# Altium PCB ISL6236A_DEMO.PcbDoc
Units mm, origin at the board's own origin, x right, y up, seen from the top; angles counter-clockwise.
Board outline 50 x 50 mm, 2 copper layers (Top Layer, Bottom Layer); 41 components, 27 nets, 119 pads, 0 vias.
Unrouted connection lines stored in the file: 88.
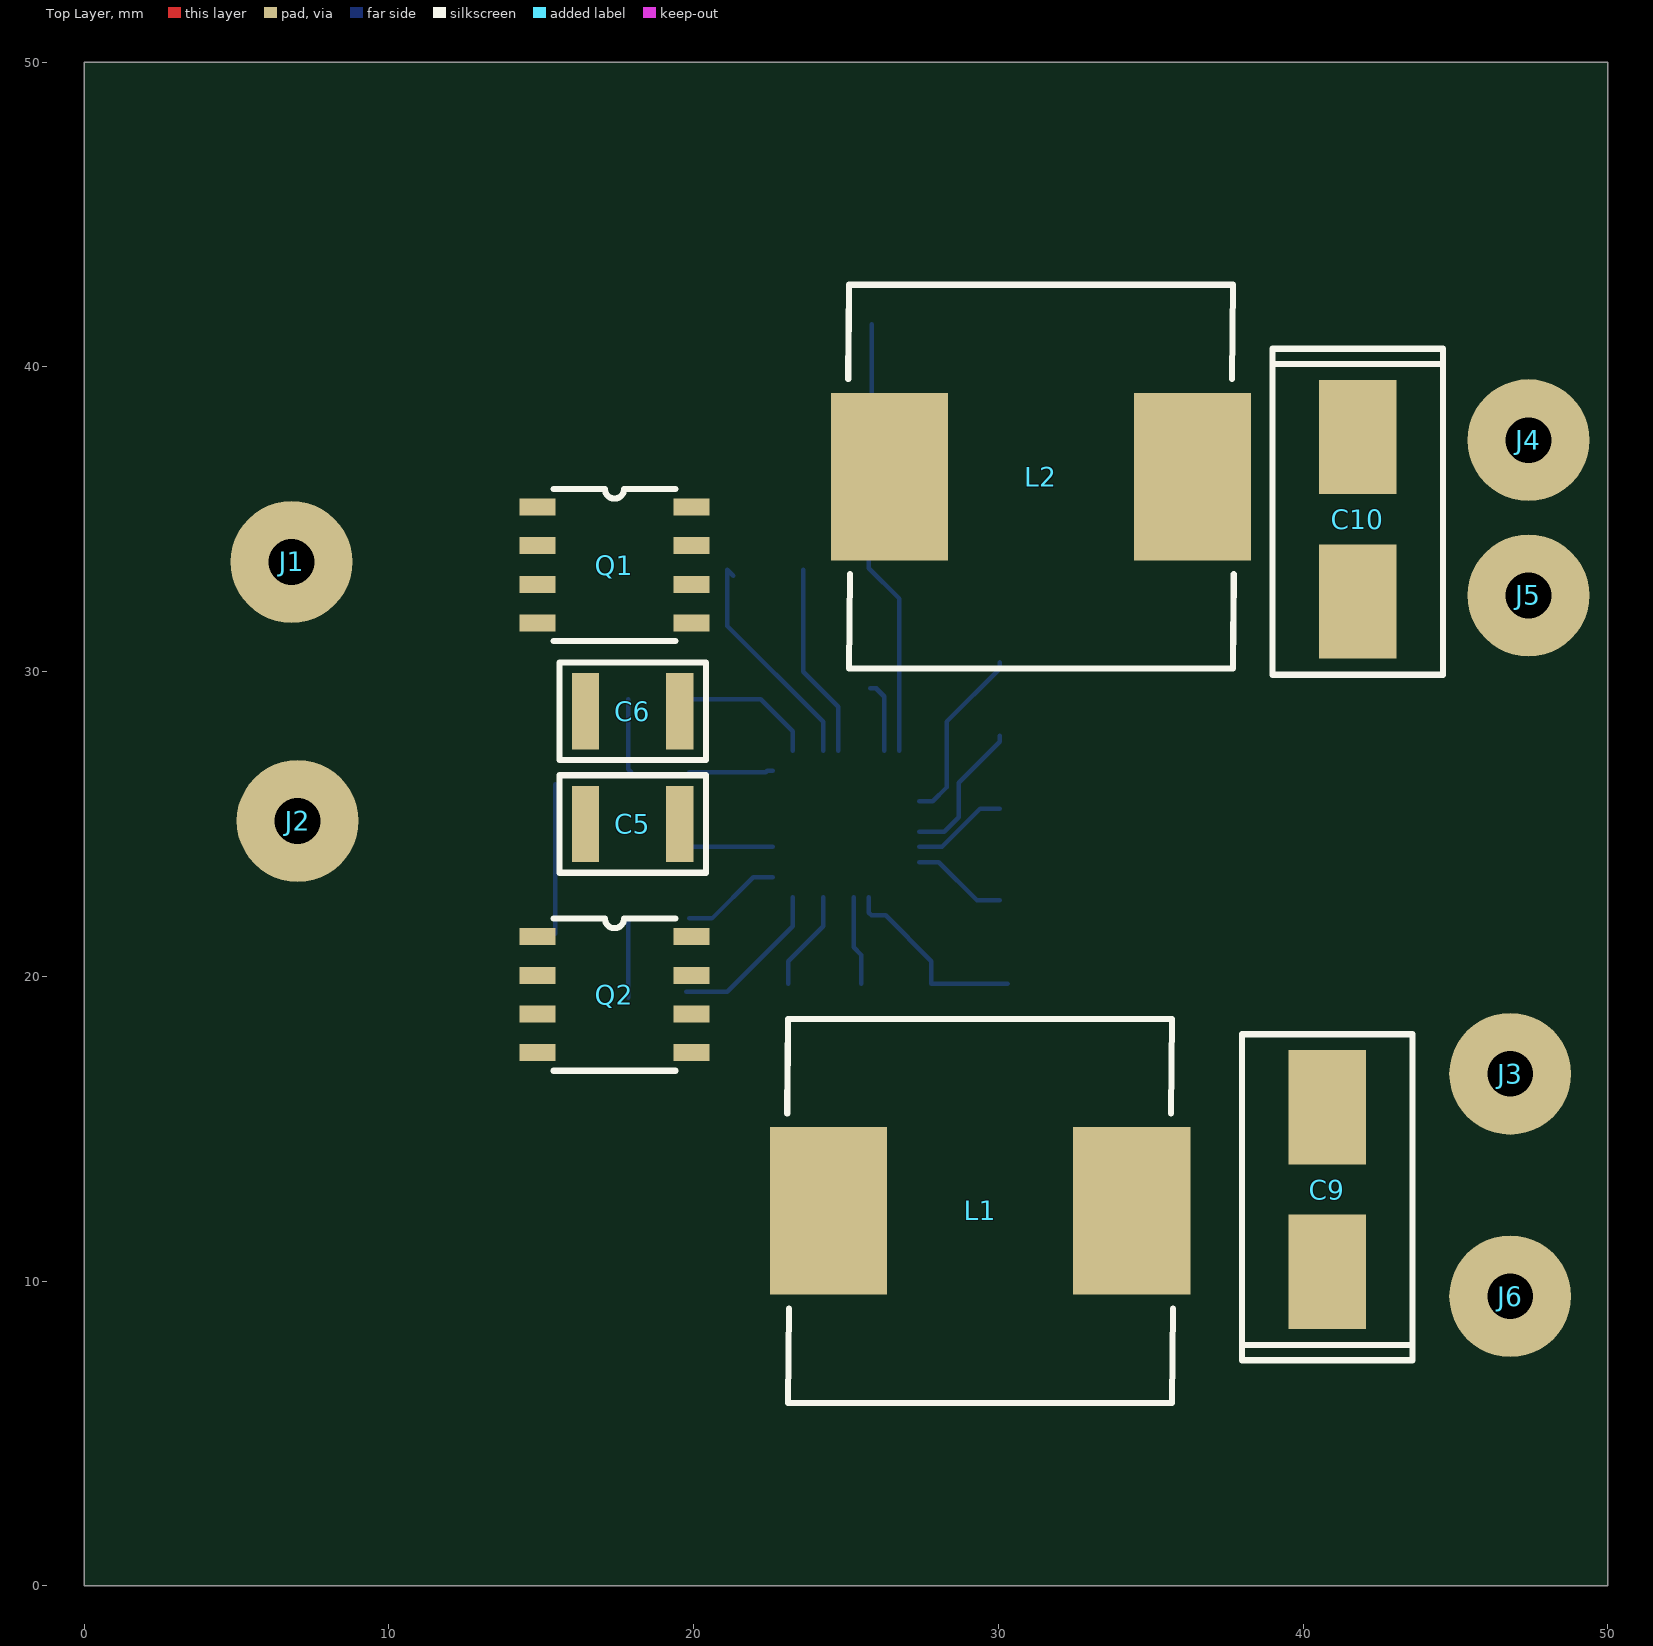
[diagram p0: Top Layer view]
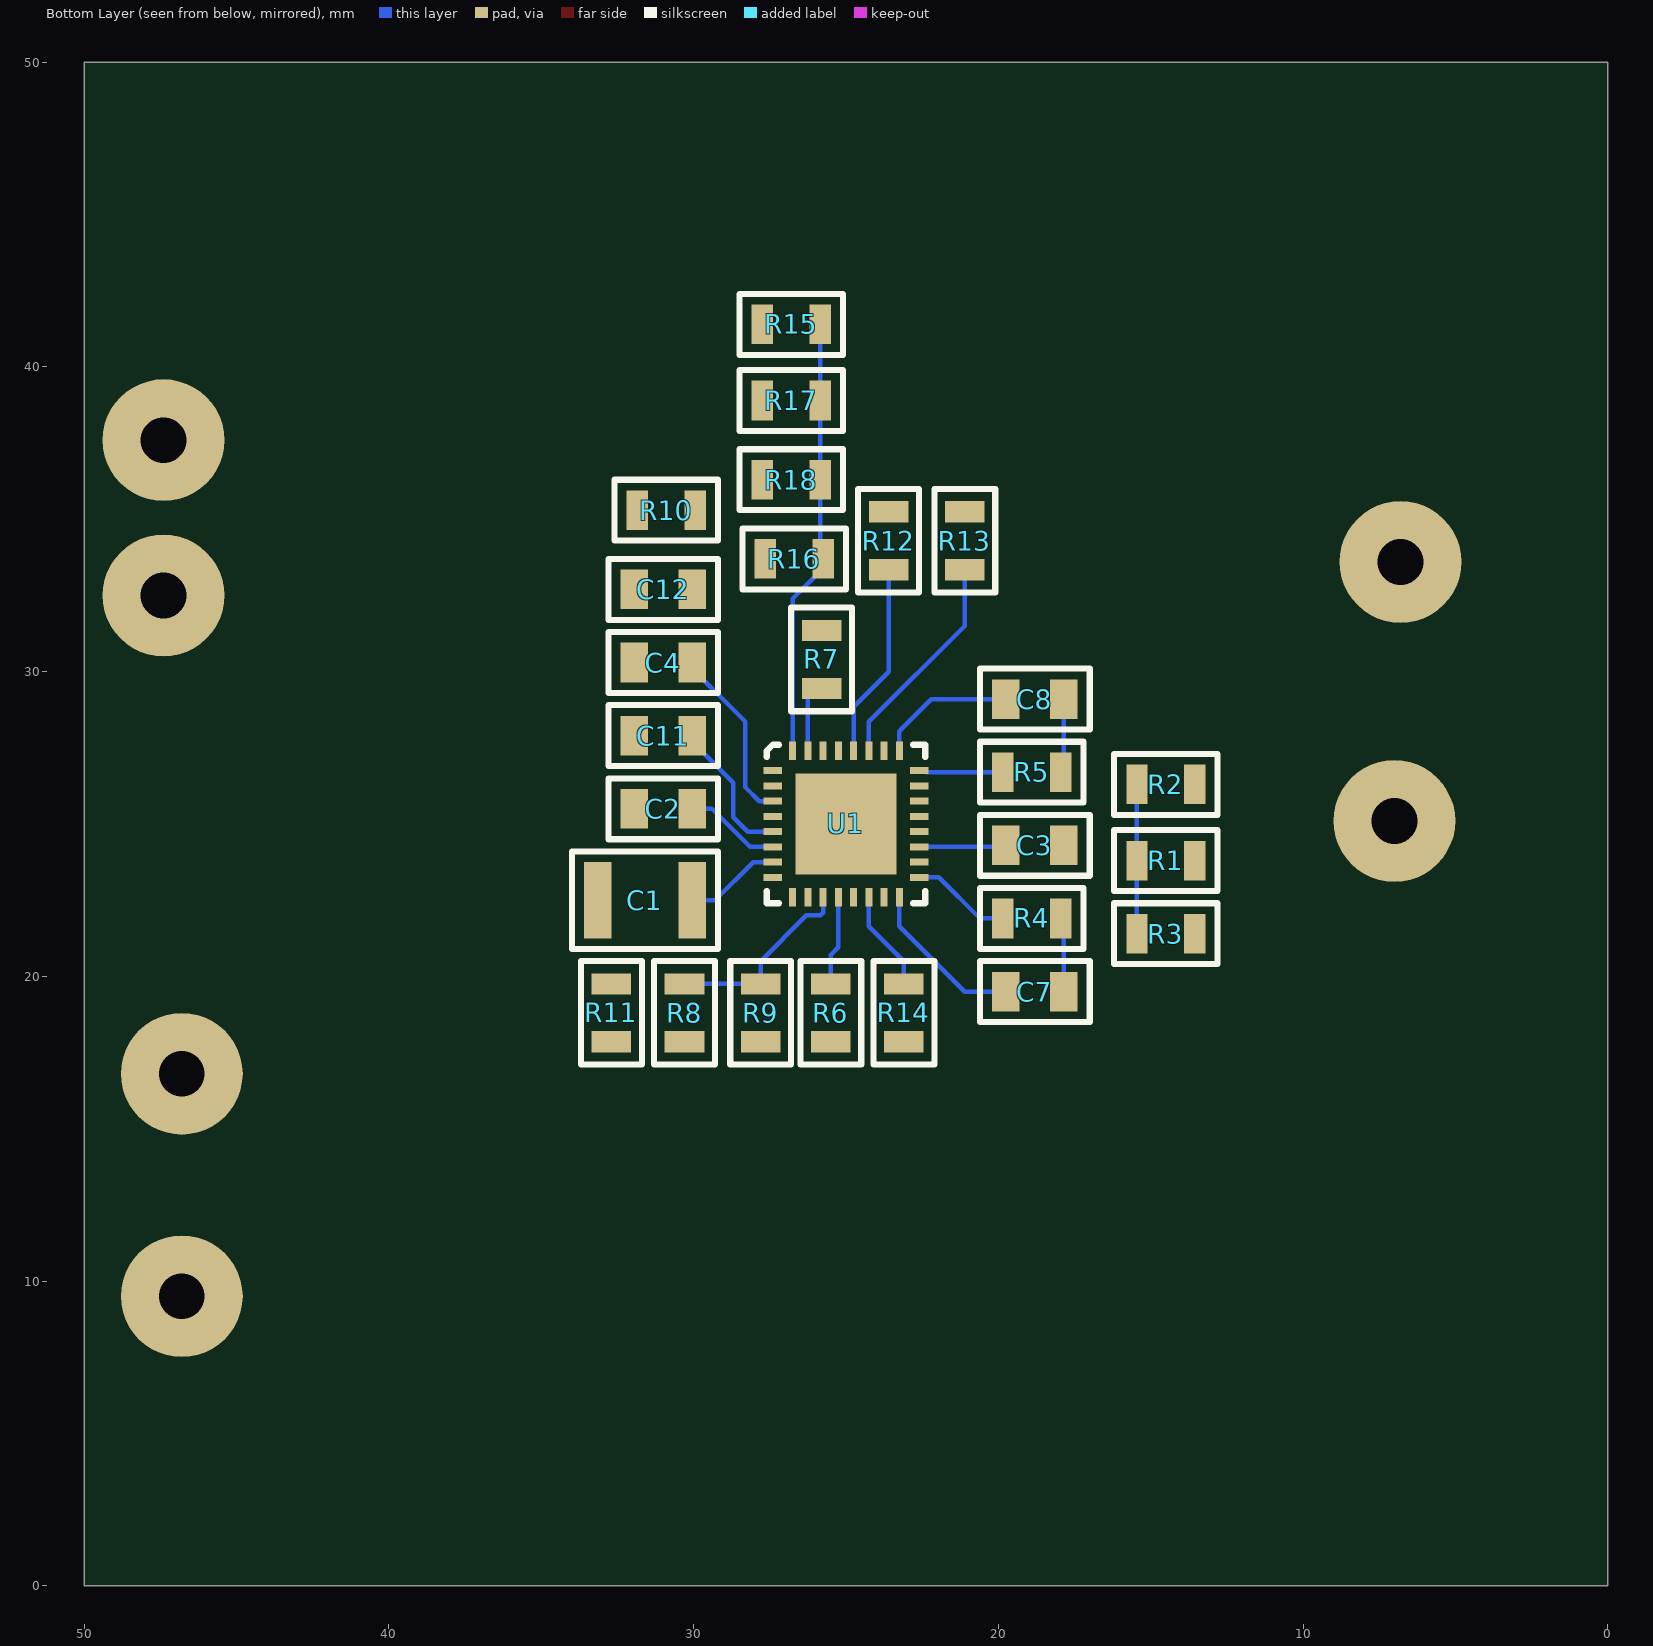
[diagram p1: Bottom Layer view, seen from below]

## Layer stack, top to bottom
Top Solder: solder mask 0.0102, Solder Resist, Dk 3.5
Top Layer: signal copper 0.0356
Dielectric 1: dielectric 0.32, FR-4, Dk 4.8
Bottom Layer: signal copper 0.0356
Bottom Solder: solder mask 0.0102, Solder Resist, Dk 3.5

## Board outline
0,50 50,50 50,0 0,0

## Design rules (kind name [scope] priority, off if disabled: settings)
Clearance [All] p1: gap=0.15 ignorepadtopadclearanceinfootprint=FALSE
ComponentClearance [All] p1: gap=0.1 collisioncheckmode=3 verticalgap=0.1 showdistances=FALSE
MinimumSolderMaskSliver [All] p1: minsoldermaskwidth=0.1
PolygonConnect [All] p1: connectstyle=Relief reliefconductorwidth=0.254 reliefentries=4 polygonreliefangle="90 Angle" airgapwidth=0.254
RoutingVias [All] p1: holewidth=0.711 width=1.27 viastyle="Through Hole" minholewidth=0.711 minwidth=1.27 maxholewidth=0.711 maxwidth=1.27
SilkToSolderMaskClearance [IsPad] p1: minsilkscreentomaskgap=0.1 clearancetoexposedcopper=TRUE
SolderMaskExpansion [All] p1: expansion=0.102 istentingtop=FALSE
Width [All] p1: maxlimit=10 minlimit=0.15 preferedwidth=0.15
27 further rules are at their usual default settings.

## Components (designator, comment, footprint, x,y, rotation, side; value= is the part's Value field where it differs from the comment)
C1 "4.7uF 10V" C1210 31.6,22.5 r180 bottom
C2 "1uF, 50V" C0805 31,25.5 r180 bottom
C3 "1uF, 50V" C0805 18.8,24.3 r0 bottom
C4 "1uF, 50V" C0805 31,30.3 r180 bottom
C5 "10uF 50V" C1210 18,25 r0 top
C6 "10uF 50V" C1210 18,28.7 r0 top
C7 "100nF" C0805 18.8,19.5 r180 bottom
C8 "220nF" C0805 18.8,29.1 r0 bottom
C9 "330uF 10V" 7343-43 40.8,13 r90 top
C10 "330uF 10V" 7343-43 41.8,35 r270 top
C11 "10nF" C0805 31,27.9 r0 bottom
C12 "100nF" C0805 31,32.7 r0 bottom
J1 "4MMx1.5MM" PAD_WITH_HOLE_4MMx1.5MM 6.8,33.6 r0 top
J2 "4MMx1.5MM" PAD_WITH_HOLE_4MMx1.5MM 7,25.1 r0 top
J3 "4MMx1.5MM" PAD_WITH_HOLE_4MMx1.5MM 46.8,16.8 r0 top
J4 "4MMx1.5MM" PAD_WITH_HOLE_4MMx1.5MM 47.4,37.6 r0 top
J5 "4MMx1.5MM" PAD_WITH_HOLE_4MMx1.5MM 47.4,32.5 r0 top
J6 "4MMx1.5MM" PAD_WITH_HOLE_4MMx1.5MM 46.8,9.5 r0 top
L1 "2u2, DR125-2R2-R" DR125 29.4,12.3 r180 top
L2 "2u2, DR125-2R2-R" DR125 31.4,36.4 r0 top
Q1 "SI4816BDY-T1-GE3" SO-8 17.4,33.5 r0 top
Q2 "SI4816BDY-T1-GE3" SO-8 17.4,19.4 r0 top
R1 "0R" R0805 14.5,23.8 r180 bottom
R2 "0R" R0805 14.5,26.3 r0 bottom
R3 "10R" R0805 14.5,21.4 r180 bottom
R4 "10R" R0805 18.9,21.9 r0 bottom
R5 "10R" R0805 18.9,26.7 r180 bottom
R6 "200K" R0805 25.5,18.8 r270 bottom
R7 "200K" R0805 25.8,30.4 r270 bottom
R8 "DNF" R0805 30.3,18.8 r90 bottom
R9 "0R" R0805 27.8,18.8 r270 bottom
R10 "10K" R0805 30.9,35.3 r180 bottom
R11 "DNF" R0805 32.7,18.8 r90 bottom
R12 "200K" R0805 23.6,34.3 r90 bottom
R13 "200K" R0805 21.1,34.3 r90 bottom
R14 "10K" R0805 23.1,18.8 r270 bottom
R15 "DNF" R0805 26.8,41.4 r180 bottom
R16 "0R" R0805 26.7,33.7 r0 bottom
R17 "DNF" R0805 26.8,38.9 r180 bottom
R18 "DNF" R0805 26.8,36.3 r0 bottom
U1 "ISL6236AIRZ" LL32.5x5B 25,25 r180 bottom

## Footprints (in the part's own frame and the unit in brackets; to place one, negate y for a bottom-side part, rotate by r counter-clockwise, add the part's x,y. Pads: shape width x height; smd on the part's side, far side on the other; paste and mask are expansions set on the pad)
7343-43 [mm]
  rect 3.75x2.55 smd: 1(-2.7,0) 2(2.7,0)
  silkscreen extent -5.6,-2.8 5.1,2.8
C0805 [mm]
  rect 0.9x1.3 smd: 1(-0.95,0) 2(0.95,0)
  silkscreen extent -1.8,-1 1.8,1
C1210 [mm]
  rect 0.9x2.5 smd: 1(-1.55,0) 2(1.55,0)
  silkscreen extent -2.4,-1.6 2.4,1.6
DR125 [mm]
  rect 3.85x5.5 smd: 1(-4.975,0) 2(4.975,0)
  silkscreen extent -6.33,-6.3 6.33,6.3
LL32.5x5B [mm]
  rect 0.6x0.23 smd mask+0.051: 1(-2.4,1.75) 2(-2.4,1.25) 3(-2.4,0.75) 4(-2.4,0.25) 5(-2.4,-0.25) 6(-2.4,-0.75) 7(-2.4,-1.25) 8(-2.4,-1.75) 17(2.4,-1.75) 18(2.4,-1.25) 19(2.4,-0.75) 20(2.4,-0.25) 21(2.4,0.25) 22(2.4,0.75) 23(2.4,1.25) 24(2.4,1.75)
  rect 0.23x0.6 smd mask+0.051: 9(-1.75,-2.4) 10(-1.25,-2.4) 11(-0.75,-2.4) 12(-0.25,-2.4) 13(0.25,-2.4) 14(0.75,-2.4) 15(1.25,-2.4) 16(1.75,-2.4) 25(1.75,2.4) 26(1.25,2.4) 27(0.75,2.4) 28(0.25,2.4) 29(-0.25,2.4) 30(-0.75,2.4) 31(-1.25,2.4) 32(-1.75,2.4)
  rect 3.3x3.3 smd mask+0.051: 33(0,0)
  silkscreen extent -2.6,-2.6 2.6,2.6
PAD_WITH_HOLE_4MMx1.5MM [mm]
  round 4 hole 1.5: 1(0,0)
R0805 [mm]
  rect 0.7x1.3 smd: 1(-0.95,0) 2(0.95,0)
  silkscreen extent -1.7,-1 1.7,1
SO-8 [mm]
  rect 1.194x0.559 smd: 1(-2.527,1.905) 2(-2.527,0.635) 3(-2.527,-0.635) 4(-2.527,-1.905) 5(2.527,-1.905) 6(2.527,-0.635) 7(2.527,0.635) 8(2.527,1.905)
  silkscreen extent -2,-2.5 2,2.5

## Part data
C1: library part C3225X7R1H105M/2.00, "Cap Ceramic 1uF 50V X7R 20% SMD 1210 125°C Blister T/R", Capacitance=1uF, Case Code (Imperial)=1210, Case Code (Metric)=3225, Dielectric=X7R, Manufacturer=TDK, Max Operating Temperature=125°C, Min Operating Temperature=-55°C, Package Quantity=1, Supplier Part Number 1=48T2930, Tolerance=20%, Voltage Rating=50V, Case/Package=1210, Category="Ceramic Capacitors", ComponentLink1Description=https://datasheet.ciiva.com/162/c-series-generalappl-b11-162224.pdf?src-supplier=Digi-Key, ComponentLink1URL=https://datasheet.ciiva.com/162/c-series-generalappl-b11-162224.pdf?src-supplier=Digi-Key, ComponentLink2Description=https://datasheet.ciiva.com/162/c-series-generalappl-b11-162225.pdf?src-supplier=Digi-Key, ComponentLink2URL=https://datasheet.ciiva.com/162/c-series-generalappl-b11-162225.pdf?src-supplier=Digi-Key, ComponentLink3Description=https://datasheet.ciiva.com/162/c-series-generalappl-b11-162223.pdf?src-supplier=Digi-Key, ComponentLink3URL=https://datasheet.ciiva.com/162/c-series-generalappl-b11-162223.pdf?src-supplier=Digi-Key, Construction=Flat, Length=0.126inch, Manufacturer Part Number=C3225X7R1H105M/2.00, Mount="Surface Mount", Number of Pins=2, Packaging="Tape and Reel", RoHS=Yes, RoHS Compliant=Yes, Series=C, Supplier 1=Newark, Thickness=0.087inch, Voltage Rating (DC)=50V, Width=0.098inch
C2 C3 C4: library part C2012X7R1H105K125AB, "C Series 0805 1 uF 50 V ±10% Tolerance X7R SMT Multilayer Ceramic Capacitor", Capacitance=1uF, Case Code (Imperial)=0805, Case Code (Metric)=2012, Dielectric=X7R, Dielectric Material=Ceramic, Manufacturer=TDK, Max Operating Temperature=125°C, Min Operating Temperature=-55°C, Package Quantity=1, Supplier Part Number 1=79Y4372, Tolerance=10%, Voltage Rating=50V, Case/Package=0805, Category="Ceramic Capacitors", ComponentLink1Description=https://datasheet.ciiva.com/22718/1796654-22718037.pdf?src-supplier=Element14, ComponentLink1URL=https://datasheet.ciiva.com/22718/1796654-22718037.pdf?src-supplier=Element14, ComponentLink2Description=https://datasheet.ciiva.com/6274/tdkmlcccaprange-6274890.pdf?src-supplier=Digi-Key, ComponentLink2URL=https://datasheet.ciiva.com/6274/tdkmlcccaprange-6274890.pdf?src-supplier=Digi-Key, ComponentLink3Description=https://datasheet.ciiva.com/23803/1796654-23803036.pdf?src-supplier=Newark, ComponentLink3URL=https://datasheet.ciiva.com/23803/1796654-23803036.pdf?src-supplier=Newark, ComponentLink4Description=https://datasheet.ciiva.com/28673/mlcc-commercial-general-en-28673565.pdf?src-supplier=Element14, ComponentLink4URL=https://datasheet.ciiva.com/28673/mlcc-commercial-general-en-28673565.pdf?src-supplier=Element14, ComponentLink5Description=https://datasheet.ciiva.com/6274/tdkmlcccaprange-6274886.pdf?src-supplier=Digi-Key, ComponentLink5URL=https://datasheet.ciiva.com/6274/tdkmlcccaprange-6274886.pdf?src-supplier=Digi-Key, ComponentLink6Description=https://datasheet.ciiva.com/6274/tdkmlcccaprange-6274888.pdf?src-supplier=Digi-Key, ComponentLink6URL=https://datasheet.ciiva.com/6274/tdkmlcccaprange-6274888.pdf?src-supplier=Digi-Key, ComponentLink7Description=https://datasheet.ciiva.com/24191/general-b11-24191449.pdf?src-supplier=Future+Electronics, ComponentLink7URL=https://datasheet.ciiva.com/24191/general-b11-24191449.pdf?src-supplier=Future+Electronics, Construction=Flat, Depth=1.25mm, Height=1.25mm, Lead Free="Lead Free", Length=2mm, Manufacturer Part Number=C2012X7R1H105K125AB, Mount="Surface Mount", Number of Pins=2, Packaging="Tape and Reel", Pricing 1="1=0.07800, 2000=0.07500, 4000=0.07300 (USD)", Radiation Hardening=No, REACH SVHC="No SVHC", Resistor Type=Ceramic, RoHS=Yes, RoHS Compliant=Yes, Series=C, Stock 1=428000, Supplier 1=Newark, Termination=SMD/SMT, Thickness=0.057inch, Voltage Rating (DC)=50V, Weight=0.000194oz, Width=0.049inch
C5 C6: library part UMK325BJ106MM-T, "Multilayer Ceramic Capacitors (High dielectric type), 50V, 10 uF, ± 20 %, 1210, X5R, RoHS", Capacitance=10uF, Case Code (Imperial)=1210, Case Code (Metric)=3225, Dielectric=X5R, Manufacturer="Taiyo Yuden", Max Operating Temperature=85°C, Min Operating Temperature=-55°C, Package Quantity=500, Supplier Part Number 1=61M4721, Tolerance=20%, Voltage=50V, Case/Package=1210, Category="Ceramic Capacitors", ComponentLink1Description=https://datasheet.ciiva.com/141/umk325bj106mm-t-ss-141730.pdf?src-supplier=Digi-Key, ComponentLink1URL=https://datasheet.ciiva.com/141/umk325bj106mm-t-ss-141730.pdf?src-supplier=Digi-Key, ComponentLink2Description=https://datasheet.ciiva.com/15922/1153umk325bj106mm-t-15922661.pdf?src-supplier=Onlinecomponents.com, ComponentLink2URL=https://datasheet.ciiva.com/15922/1153umk325bj106mm-t-15922661.pdf?src-supplier=Onlinecomponents.com, ComponentLink3Description=https://datasheet.ciiva.com/11601/umk325bj106mm-t-ss-11601831.pdf?src-supplier=Avnet, ComponentLink3URL=https://datasheet.ciiva.com/11601/umk325bj106mm-t-ss-11601831.pdf?src-supplier=Avnet, ComponentLink4Description=https://datasheet.ciiva.com/30172/998umk325bj106mm-t-30172061.pdf?src-supplier=Onlinecomponents.com, ComponentLink4URL=https://datasheet.ciiva.com/30172/998umk325bj106mm-t-30172061.pdf?src-supplier=Onlinecomponents.com, ComponentLink5Description=https://datasheet.ciiva.com/7975/1497285-7975925.pdf?src-supplier=Element14, ComponentLink5URL=https://datasheet.ciiva.com/7975/1497285-7975925.pdf?src-supplier=Element14, ComponentLink6Description=https://datasheet.ciiva.com/7975/mlcc-all-e-7975926.pdf?src-supplier=Element14, ComponentLink6URL=https://datasheet.ciiva.com/7975/mlcc-all-e-7975926.pdf?src-supplier=Element14, ComponentLink7Description=https://datasheet.ciiva.com/5745/mlcc-all-e-5745129.pdf?src-supplier=Farnell, ComponentLink7URL=https://datasheet.ciiva.com/5745/mlcc-all-e-5745129.pdf?src-supplier=Farnell, ComponentLink8Description=https://datasheet.ciiva.com/5744/1497285-5744924.pdf?src-supplier=Farnell, ComponentLink8URL=https://datasheet.ciiva.com/5744/1497285-5744924.pdf?src-supplier=Farnell, Construction=Flat, Contact Plating=Nickel, Depth=2.5mm, Halogen Free="Halogen Free", Height=2.5mm, Lead Free="Lead Free", Length=3.2mm, Manufacturer Part Number=UMK325BJ106MM-T, Mount="Surface Mount", Number of Pins=2, Packaging="Tape and Reel", Pricing 1="500=0.25400, 1000=0.23400, 2000=0.22800, 3000=0.22100, 5000=0.21000 (USD)", Radiation Hardening=No, REACH SVHC="No SVHC", RoHS=Yes, RoHS Compliant=Yes, Series=M, Stock 1=1500, Supplier 1=Avnet, Termination=SMD/SMT, Thickness=0.106inch, Voltage Rating=50V, Voltage Rating (DC)=50V, Width=0.098inch
C7 C12: library part C2012X7R1H104K085AA, "C Series 0805 0.1 uF 50 V ±10 % Tolerance X7R SMT Multilayer Ceramic Capacitor", Case Code (Imperial)=0805, Case Code (Metric)=2012, Dielectric=X7R, Dielectric Material=Ceramic, Manufacturer=TDK, Max Operating Temperature=125°C, Min Operating Temperature=-55°C, Package Quantity=1, Supplier Part Number 1=445-7534-1-ND, Tolerance=10%, Voltage=50V, Capacitance=100nF, Case/Package=0805, Category="Ceramic Capacitors", ComponentLink1Description=https://datasheet.ciiva.com/11788/0900766b80c1bb00-11788128.pdf?src-supplier=RSComponents, ComponentLink1URL=https://datasheet.ciiva.com/11788/0900766b80c1bb00-11788128.pdf?src-supplier=RSComponents, ComponentLink2Description=https://datasheet.ciiva.com/6250/tdkmlcccaprange-6250821.pdf?src-supplier=Digi-Key, ComponentLink2URL=https://datasheet.ciiva.com/6250/tdkmlcccaprange-6250821.pdf?src-supplier=Digi-Key, ComponentLink3Description=https://datasheet.ciiva.com/24191/e412-c-24191447.pdf?src-supplier=Future+Electronics, ComponentLink3URL=https://datasheet.ciiva.com/24191/e412-c-24191447.pdf?src-supplier=Future+Electronics, ComponentLink4Description=https://datasheet.ciiva.com/6250/tdkmlcccaprange-6250824.pdf?src-supplier=Digi-Key, ComponentLink4URL=https://datasheet.ciiva.com/6250/tdkmlcccaprange-6250824.pdf?src-supplier=Digi-Key, ComponentLink5Description=https://datasheet.ciiva.com/23803/1796654-23803035.pdf?src-supplier=Newark, ComponentLink5URL=https://datasheet.ciiva.com/23803/1796654-23803035.pdf?src-supplier=Newark, ComponentLink6Description=https://datasheet.ciiva.com/28602/1571323-28602204.pdf?src-supplier=Element14, ComponentLink6URL=https://datasheet.ciiva.com/28602/1571323-28602204.pdf?src-supplier=Element14, Construction=Flat, Depth=1.25mm, Height=0.85mm, Lead Free="Lead Free", Length=2mm, Manufacturer Part Number=C2012X7R1H104K085AA, Mount="Surface Mount", Number of Pins=2, Packaging="Tape and Reel", Pricing 1="1=0.15000, 10=0.10400, 50=0.05900, 100=0.04880, 500=0.03422, 1000=0.02833 (USD)", Radiation Hardening=No, REACH SVHC="No SVHC", Resistor Type=Ceramic, RoHS=Yes, RoHS Compliant=Yes, Series=C, Stock 1=4695, Supplier 1=Digi-Key, Termination=SMD/SMT, Thickness=0.037inch, Voltage Rating=50V, Voltage Rating (DC)=50V, Weight=0.000194oz, Width=0.049inch
C8: library part C2012X7R1H224K125AA, "CERAMIC CAPACITOR 0.22UF, 50V, X7R, 10%, 0805, FULL REEL; Product Range:C Series; Capacitance:0.22 F; Capacitance Tolerance:  10%; Dielectric Characteristic:X7R; Voltage Rating:50V; Ceramic Capacitor Case:0805 ^2012 Metric]; MSL:-", Case Code (Imperial)=0805, Case Code (Metric)=2012, Dielectric=X7R, Dielectric Material=Ceramic, Manufacturer=TDK, Max Operating Temperature=125°C, Min Operating Temperature=-55°C, Package Quantity=1, Supplier Part Number 1=445-1350-1-ND, Tolerance=10%, Voltage=50V, Capacitance=220nF, Case/Package=0805, Category="Ceramic Capacitors", ComponentLink1Description=https://datasheet.ciiva.com/11788/0900766b80c1bb00-11788127.pdf?src-supplier=RSComponents, ComponentLink1URL=https://datasheet.ciiva.com/11788/0900766b80c1bb00-11788127.pdf?src-supplier=RSComponents, ComponentLink2Description=https://datasheet.ciiva.com/17487/e412-c-17487255.pdf?src-supplier=Avnet+Europe, ComponentLink2URL=https://datasheet.ciiva.com/17487/e412-c-17487255.pdf?src-supplier=Avnet+Europe, ComponentLink3Description=https://datasheet.ciiva.com/6292/tdkmlcccaprange-6292269.pdf?src-supplier=Digi-Key, ComponentLink3URL=https://datasheet.ciiva.com/6292/tdkmlcccaprange-6292269.pdf?src-supplier=Digi-Key, ComponentLink4Description=https://datasheet.ciiva.com/16427/e412-c-16427832.pdf?src-supplier=Future+Electronics, ComponentLink4URL=https://datasheet.ciiva.com/16427/e412-c-16427832.pdf?src-supplier=Future+Electronics, ComponentLink5Description=https://datasheet.ciiva.com/28602/1571323-28602205.pdf?src-supplier=Element14, ComponentLink5URL=https://datasheet.ciiva.com/28602/1571323-28602205.pdf?src-supplier=Element14, Construction=Flat, Depth=1.25mm, Height=1.25mm, Lead Free="Lead Free", Length=2mm, Manufacturer Part Number=C2012X7R1H224K125AA, Mount="Surface Mount", Number of Pins=2, Packaging="Tape and Reel", Pricing 1="1=0.16000, 10=0.11600, 50=0.06580, 100=0.05450, 500=0.03824, 1000=0.03166 (USD)", Radiation Hardening=No, REACH SVHC="No SVHC", Resistor Type=Ceramic, RoHS=Yes, RoHS Compliant=Yes, Series=C, Stock 1=191329, Supplier 1=Digi-Key, Termination=SMD/SMT, Thickness=0.057inch, Voltage Rating=50V, Voltage Rating (DC)=50V, Weight=0.000194oz, Width=0.049inch
C9 C10: library part T530X337M010ATE004, "Cap Tant Solid 330uF 10V X CASE 20% (7.3 X 4.3 X 4mm) SMD 7343-43 0.004 Ohm 125 C T/R", Capacitance=330uF, Case Code (Imperial)=2917, Case Code (Metric)=7343, ESR (Equivalent Series Resistance)=4mR, Leakage Current=330uA, Manufacturer=KEMET, Max Operating Temperature=125°C, Min Operating Temperature=-55°C, Package Quantity=500, Ripple Current=8.2A, Supplier Part Number 1=399-10378-1-ND, Tolerance=20%, Voltage=10V, Case/Package=2917, Category="Polymer Capacitors", ComponentLink1Description=https://datasheet.ciiva.com/11794/0900766b80deaa91-11794477.pdf?src-supplier=RSComponents, ComponentLink1URL=https://datasheet.ciiva.com/11794/0900766b80deaa91-11794477.pdf?src-supplier=RSComponents, ComponentLink2Description=https://datasheet.ciiva.com/14593/70096008-14593753.pdf?src-supplier=Allied+Electronics, ComponentLink2URL=https://datasheet.ciiva.com/14593/70096008-14593753.pdf?src-supplier=Allied+Electronics, Construction=Flat, Depth=4.3mm, Dissipation Factor=8%, Features="General Purpose", Height=4mm, Height - Seated (Max)=0.169inch, Length=7.3mm, Life (Hours)=2000Hour, Manufacturer Part Number=T530X337M010ATE004, Mount="Surface Mount,PCB", Packaging="Tape and Reel", Polarity=Polar, Pricing 1="1=8.13000, 10=7.23000, 50=6.32620, 100=5.78400 (USD)", REACH SVHC="No SVHC", RoHS=Yes, RoHS Compliant=Yes, Series=T530, Stock 1=41, Supplier 1=Digi-Key, Termination=SMD/SMT, Voltage Rating=10V, Voltage Rating (DC)=10V, Width=4.3mm
C11: library part VJ0805Y103KNAAO, "0805 VJ 10nF Ceramic Multilayer Capacitor; 50V; +105C; X7R Dielectric; +/-10% SMD", Case Code (Imperial)=0805, Case Code (Metric)=2012, Dielectric=X7R, Manufacturer="Vishay Vitramon", Max Operating Temperature=125°C, Min Operating Temperature=-55°C, Package Quantity=1, Supplier Part Number 1=720-1244-1-ND, Tolerance=10%, Voltage=50V, Capacitance=10nF, Case/Package=0805, Category="Ceramic Capacitors", ComponentLink1Description=https://datasheet.ciiva.com/25613/0900766b8104796c-25613141.pdf?src-supplier=RSComponents, ComponentLink1URL=https://datasheet.ciiva.com/25613/0900766b8104796c-25613141.pdf?src-supplier=RSComponents, ComponentLink2Description=https://datasheet.ciiva.com/148/nonmagneticepoxybond-148342.pdf?src-supplier=Digi-Key, ComponentLink2URL=https://datasheet.ciiva.com/148/nonmagneticepoxybond-148342.pdf?src-supplier=Digi-Key, ComponentLink3Description=https://datasheet.ciiva.com/148/nonmagneticepoxybond-148343.pdf?src-supplier=Digi-Key, ComponentLink3URL=https://datasheet.ciiva.com/148/nonmagneticepoxybond-148343.pdf?src-supplier=Digi-Key, ComponentLink4Description=https://datasheet.ciiva.com/148/nonmagneticepoxybond-148344.pdf?src-supplier=Digi-Key, ComponentLink4URL=https://datasheet.ciiva.com/148/nonmagneticepoxybond-148344.pdf?src-supplier=Digi-Key, ComponentLink5Description=https://datasheet.ciiva.com/46417/1805046-46417853.pdf?src-supplier=Element14, ComponentLink5URL=https://datasheet.ciiva.com/46417/1805046-46417853.pdf?src-supplier=Element14, ComponentLink6Description=https://datasheet.ciiva.com/46417/1805046-46417854.pdf?src-supplier=Element14, ComponentLink6URL=https://datasheet.ciiva.com/46417/1805046-46417854.pdf?src-supplier=Element14, Construction=Flat, Depth=1.25mm, Height=1.45mm, Length=2mm, Manufacturer Part Number=VJ0805Y103KNAAO, Mount="Surface Mount", Packaging="Tape and Reel", Pricing 1="1=0.67000, 10=0.41200, 50=0.29580, 100=0.25580, 500=0.18218, 1000=0.15504 (USD)", Radiation Hardening=No, REACH SVHC=Unknown, RoHS=Yes, RoHS Compliant=Yes, Series=VJ, Stock 1=1009, Supplier 1=Digi-Key, Termination=SMD/SMT, Thickness=0.057inch, Voltage Rating=50V, Voltage Rating (DC)=50V, Width=0.049inch
J1 J2 J3 J4 J5 J6: library part PAD_WITH_HOLE_4MMx1.5MM, "Pad with a hole 4mm x 1.5mm"
L1 L2: library part DR125-2R2-R, "FIXED IND 2.2UH 10.9A 4.5 MOHM", Case/Package=Nonstandard, Current Rating=10.9A, DC Resistance (DCR)=4.5mR, Inductance=2.2uH, Inductance Tolerance=20%, Manufacturer="Eaton Cooper", Max Operating Temperature=125°C, Min Operating Temperature=-40°C, Package Quantity=600, Resistor Type=Wirewound, Saturation Current=15A, Self Resonant Frequency=100kHz, Supplier Part Number 1=513-1662-1-ND, Category="Fixed Inductors", ComponentLink1Description=https://datasheet.ciiva.com/14667/0900766b8116a153-14667792.pdf?src-supplier=RSComponents, ComponentLink1URL=https://datasheet.ciiva.com/14667/0900766b8116a153-14667792.pdf?src-supplier=RSComponents, ComponentLink2Description=https://datasheet.ciiva.com/26926/getdatasheetpartid-571249-26926912.pdf?src-supplier=Verical, ComponentLink2URL=https://datasheet.ciiva.com/26926/getdatasheetpartid-571249-26926912.pdf?src-supplier=Verical, ComponentLink3Description=https://datasheet.ciiva.com/8004/87246-8004874.pdf?src-supplier=Element14, ComponentLink3URL=https://datasheet.ciiva.com/8004/87246-8004874.pdf?src-supplier=Element14, Core Material=Ferrite, DC Current=10.9A, Depth=12.5mm, Height=6mm, Height - Seated (Max)=0.236inch, Lead Free="Lead Free", Length=12.5mm, Manufacturer Part Number=DR125-2R2-R, Max DC Current=10.9A, Military Standard=Not, Mount="Surface Mount", Number of Pins=2, Packaging="Tape and Reel", Pricing 1="1=1.35000, 10=1.25100, 25=1.15520, 50=0.96240, 100=0.90480, 250=0.80848 (USD)", Radiation Hardening=No, Rated Current-Max=10.9A, REACH SVHC="No SVHC", RMS Current (Irms)=10.9A, RoHS=Yes, RoHS Compliant=Yes, Series=DR, Shielding=Shielded, Supplier 1=Digi-Key, Termination=SMD/SMT, Test Frequency=100kHz, Tolerance=20%, Weight=0.144oz, Width=0.492inch
Q1 Q2: "Transistor MOSFET Array Dual N-CH 30V 5.8A/8.2A 8-Pin SOIC T/R", Case/Package=SO, Continuous Drain Current (ID)=5.8A, Drain to Source Resistance=9.3mR, Drain to Source Voltage (Vdss)=30V, Drain-source On Resistance-Max=18.5mR, Gate to Source Voltage (Vgs)=20V, Manufacturer="Vishay Siliconix", Max Operating Temperature=150°C, Max Power Dissipation=1.25W, Min Operating Temperature=-55°C, Package Quantity=1, Supplier Part Number 1=SI4816BDY-T1-GE3CT-ND, Threshold Voltage=3V, Category=MOSFETs, ComponentLink1Description=https://datasheet.ciiva.com/26789/si4816bdy-t1-ge3-26789227.pdf?src-supplier=IIIC, ComponentLink1URL=https://datasheet.ciiva.com/26789/si4816bdy-t1-ge3-26789227.pdf?src-supplier=IIIC, ComponentLink2Description=https://datasheet.ciiva.com/7710/si4816bd-7710215.pdf?src-supplier=Element14, ComponentLink2URL=https://datasheet.ciiva.com/7710/si4816bd-7710215.pdf?src-supplier=Element14, ComponentLink3Description=https://datasheet.ciiva.com/24158/si4816bd-24158215.pdf?src-supplier=Future+Electronics, ComponentLink3URL=https://datasheet.ciiva.com/24158/si4816bd-24158215.pdf?src-supplier=Future+Electronics, ComponentLink4Description=https://datasheet.ciiva.com/928/si4816bd-928461.pdf?src-supplier=Digi-Key, ComponentLink4URL=https://datasheet.ciiva.com/928/si4816bd-928461.pdf?src-supplier=Digi-Key, ComponentLink5Description=https://datasheet.ciiva.com/928/si4816bd-928462.pdf?src-supplier=Digi-Key, ComponentLink5URL=https://datasheet.ciiva.com/928/si4816bd-928462.pdf?src-supplier=Digi-Key, ComponentLink6Description=https://datasheet.ciiva.com/11160/si4816bd-11160494.pdf?src-supplier=Avnet, ComponentLink6URL=https://datasheet.ciiva.com/11160/si4816bd-11160494.pdf?src-supplier=Avnet, ComponentLink7Description=https://datasheet.ciiva.com/928/si4816bd-928463.pdf?src-supplier=Digi-Key, ComponentLink7URL=https://datasheet.ciiva.com/928/si4816bd-928463.pdf?src-supplier=Digi-Key, ComponentLink8Description=https://datasheet.ciiva.com/22707/1911984-22707813.pdf?src-supplier=Element14, ComponentLink8URL=https://datasheet.ciiva.com/22707/1911984-22707813.pdf?src-supplier=Element14, Contact Plating=Tin,Matte, Fall Time=9ns, FET Type="2 N-Channel", Height=1.55mm, Lead Free="Lead Free", Length=5mm, Manufacturer Part Number=SI4816BDY-T1-GE3, Mount="Surface Mount", Number of Channels=2, Number of Elements=2, Number of Pins=8, On-State Resistance=18.5mR, Packaging="Tape and Reel", Polarity=N-CHANNEL, Pricing 1="1=1.72000, 10=1.54500, 100=1.24180, 500=1.02024, 1000=0.87450 (USD)", Radiation Hardening=No, Rds On Max=18.5mR, REACH SVHC="No SVHC", Rise Time=9ns, RoHS=Yes, RoHS Compliant=Yes, Series="LITTLE FOOT®", Supplier 1=Digi-Key, Turn-Off Delay Time=31ns, Turn-On Delay Time=13ns, Weight=0.006596oz, Width=4mm
R1 R2 R9 R16: library part ERJ-6GEY0R00V, "Resistor Thick Film 0805 0 Ohm 1-8w Surface Mount Embossed Carrier Tape and Reel", Case Code (Imperial)=0805, Case Code (Metric)=2012, Current Rating=2A, Manufacturer=Panasonic, Max Operating Temperature=155°C, Max Power Dissipation=125mW, Min Operating Temperature=-55°C, Package Quantity=1, Resistor Type="Thick Film", Supplier Part Number 1=7326514, Temperature Coefficient=600ppm/°C, Tolerance=5%, Voltage Rating=150V, Case/Package=0805, Category="Chip SMD Resistors", ComponentLink1Description=https://datasheet.ciiva.com/36526/1989607-36526237.pdf?src-supplier=Jameco, ComponentLink1URL=https://datasheet.ciiva.com/36526/1989607-36526237.pdf?src-supplier=Jameco, ComponentLink2Description=https://datasheet.ciiva.com/11821/0900766b80f806dd-11821735.pdf?src-supplier=RSComponents, ComponentLink2URL=https://datasheet.ciiva.com/11821/0900766b80f806dd-11821735.pdf?src-supplier=RSComponents, ComponentLink3Description=https://datasheet.ciiva.com/43460/1678796-43460073.pdf?src-supplier=Farnell, ComponentLink3URL=https://datasheet.ciiva.com/43460/1678796-43460073.pdf?src-supplier=Farnell, ComponentLink4Description=https://datasheet.ciiva.com/46377/1678796-46377866.pdf?src-supplier=Element14, ComponentLink4URL=https://datasheet.ciiva.com/46377/1678796-46377866.pdf?src-supplier=Element14, ComponentLink5Description=https://datasheet.ciiva.com/28695/1678796-28695877.pdf?src-supplier=Element14, ComponentLink5URL=https://datasheet.ciiva.com/28695/1678796-28695877.pdf?src-supplier=Element14, ComponentLink6Description=https://datasheet.ciiva.com/9117/aoa0000ce1-9117354.pdf?src-supplier=Avnet, ComponentLink6URL=https://datasheet.ciiva.com/9117/aoa0000ce1-9117354.pdf?src-supplier=Avnet, ComponentLink7Description=https://datasheet.ciiva.com/17215/aoa0000ce1-17215390.pdf?src-supplier=Avnet+Europe, ComponentLink7URL=https://datasheet.ciiva.com/17215/aoa0000ce1-17215390.pdf?src-supplier=Avnet+Europe, ComponentLink8Description=https://datasheet.ciiva.com/16512/aoa0000ce1-16512111.pdf?src-supplier=Avnet+Asia, ComponentLink8URL=https://datasheet.ciiva.com/16512/aoa0000ce1-16512111.pdf?src-supplier=Avnet+Asia, Construction=Rectangular, Contact Plating=Tin, Depth=1.25mm, Features="Automotive AEC-Q200", Height=0.6mm, Lead Free="Lead Free", Length=2mm, Manufacturer Part Number=ERJ-6GEY0R00V, Military Standard=Not, Mount="Surface Mount", Number of Terminations=2, Packaging="Tape and Reel", Power Rating=125mW, Pricing 1="5000=0.00900, 10000=0.00800, 15000=0.00800, 20000=0.00800 (USD)", Radiation Hardening=No, REACH SVHC="No SVHC", Resistance=0R, RoHS=Yes, RoHS Compliant=Yes, Series=ERJ, Stock 1=1075000, Supplier 1=RSComponents, Technology="THICK FILM", Termination=SMD/SMT, Voltage Rating (DC)=150V, Width=1.25mm
R3 R4 R5: library part ERJ-6GEYJ100V, "Resistor Thick Film 0805 10 Ohm 5% 1/8W 200ppm/C Molded SMD Punched Carrier T/R", Case Code (Imperial)=0805, Case Code (Metric)=2012, Manufacturer=Panasonic, Max Operating Temperature=155°C, Max Power Dissipation=125mW, Min Operating Temperature=-55°C, Package Quantity=5000, Resistance Tolerance=5%, Resistor Type="Thick Film", Supplier Part Number 1=81AC8591, Temperature Coefficient=200ppm/°C, Voltage Rating=150V, Case/Package=0805, Category="Chip SMD Resistors", ComponentLink1Description=https://datasheet.ciiva.com/34303/1989615-34303646.pdf?src-supplier=Jameco, ComponentLink1URL=https://datasheet.ciiva.com/34303/1989615-34303646.pdf?src-supplier=Jameco, ComponentLink2Description=https://datasheet.ciiva.com/11821/0900766b80f806dd-11821499.pdf?src-supplier=RSComponents, ComponentLink2URL=https://datasheet.ciiva.com/11821/0900766b80f806dd-11821499.pdf?src-supplier=RSComponents, ComponentLink3Description=https://datasheet.ciiva.com/43460/1500035-43460079.pdf?src-supplier=Farnell, ComponentLink3URL=https://datasheet.ciiva.com/43460/1500035-43460079.pdf?src-supplier=Farnell, ComponentLink4Description=https://datasheet.ciiva.com/46388/1500035-46388637.pdf?src-supplier=Element14, ComponentLink4URL=https://datasheet.ciiva.com/46388/1500035-46388637.pdf?src-supplier=Element14, ComponentLink5Description=https://datasheet.ciiva.com/16788/70255313-16788828.pdf?src-supplier=Allied+Electronics, ComponentLink5URL=https://datasheet.ciiva.com/16788/70255313-16788828.pdf?src-supplier=Allied+Electronics, ComponentLink6Description=https://datasheet.ciiva.com/16775/70255313-16775163.pdf?src-supplier=Allied+Electronics, ComponentLink6URL=https://datasheet.ciiva.com/16775/70255313-16775163.pdf?src-supplier=Allied+Electronics, ComponentLink7Description=https://datasheet.ciiva.com/9117/aoa0000ce1-9117358.pdf?src-supplier=Avnet, ComponentLink7URL=https://datasheet.ciiva.com/9117/aoa0000ce1-9117358.pdf?src-supplier=Avnet, ComponentLink8Description=https://datasheet.ciiva.com/15158/getdatasheetpartid-247141-15158885.pdf?src-supplier=Verical, ComponentLink8URL=https://datasheet.ciiva.com/15158/getdatasheetpartid-247141-15158885.pdf?src-supplier=Verical, ComponentLink9Description=https://datasheet.ciiva.com/17212/aoa0000ce1-17212058.pdf?src-supplier=Avnet+Europe, ComponentLink9URL=https://datasheet.ciiva.com/17212/aoa0000ce1-17212058.pdf?src-supplier=Avnet+Europe, Construction=Rectangular, Contact Plating=Tin, Depth=1.25mm, Height=0.6mm, Lead Free="Lead Free", Length=2mm, Manufacturer Part Number=ERJ-6GEYJ100V, Military Standard=Not, Mount="Surface Mount", Number of Terminations=2, Packaging="Tape and Reel", Power Rating=125mW, Pricing 1="1=0.01000, 5000=0.01000 (USD)", Radiation Hardening=No, REACH SVHC="No SVHC", Resistance=10R, RoHS=Yes, RoHS Compliant=Yes, Series=ERJ, Stock 1=605000, Supplier 1=Newark, Technology="THICK FILM", Termination=SMD/SMT, Tolerance=5%, Voltage Rating (DC)=150V, Width=0.049inch, Working Voltage=150V
R6 R7 R12 R13: library part ERJ-6ENF2003V, "Res Thick Film 0805 200K Ohm 1% 1/8W ±100ppm/°C Molded SMD Punched Carrier T/R", Case Code (Imperial)=0805, Case Code (Metric)=2012, Manufacturer=Panasonic, Max Operating Temperature=155°C, Max Power Dissipation=125mW, Min Operating Temperature=-55°C, Package Quantity=1, Resistance=200kR, Resistance Tolerance=1%, Resistor Type="Thick Film", Supplier Part Number 1=P200KCTR-ND, Temperature Coefficient=100ppm/°C, Voltage Rating=150V, Case/Package=0805, Category="Chip SMD Resistors", ComponentLink1Description=https://datasheet.ciiva.com/3883/3984280s8821682n1386-3883650.pdf?src-supplier=Arrow+Electronics, ComponentLink1URL=https://datasheet.ciiva.com/3883/3984280s8821682n1386-3883650.pdf?src-supplier=Arrow+Electronics, ComponentLink2Description=https://datasheet.ciiva.com/11821/0900766b80f80784-11821569.pdf?src-supplier=RSComponents, ComponentLink2URL=https://datasheet.ciiva.com/11821/0900766b80f80784-11821569.pdf?src-supplier=RSComponents, ComponentLink3Description=https://datasheet.ciiva.com/5868/426256-5868186.pdf?src-supplier=Farnell, ComponentLink3URL=https://datasheet.ciiva.com/5868/426256-5868186.pdf?src-supplier=Farnell, ComponentLink4Description=https://datasheet.ciiva.com/46374/426256-46374223.pdf?src-supplier=Element14, ComponentLink4URL=https://datasheet.ciiva.com/46374/426256-46374223.pdf?src-supplier=Element14, ComponentLink5Description=https://datasheet.ciiva.com/28577/1678782-28577790.pdf?src-supplier=Element14, ComponentLink5URL=https://datasheet.ciiva.com/28577/1678782-28577790.pdf?src-supplier=Element14, ComponentLink6Description=https://datasheet.ciiva.com/28675/1678782-28675835.pdf?src-supplier=Element14, ComponentLink6URL=https://datasheet.ciiva.com/28675/1678782-28675835.pdf?src-supplier=Element14, ComponentLink7Description=https://datasheet.ciiva.com/24070/aoa0000ce2-24070837.pdf?src-supplier=Mouser, ComponentLink7URL=https://datasheet.ciiva.com/24070/aoa0000ce2-24070837.pdf?src-supplier=Mouser, ComponentLink8Description=https://datasheet.ciiva.com/16427/aoa0000ce2-16427100.pdf?src-supplier=Future+Electronics, ComponentLink8URL=https://datasheet.ciiva.com/16427/aoa0000ce2-16427100.pdf?src-supplier=Future+Electronics, ComponentLink9Description=https://datasheet.ciiva.com/30251/aoa0000ce2-30251689.pdf?src-supplier=Onlinecomponents.com, ComponentLink9URL=https://datasheet.ciiva.com/30251/aoa0000ce2-30251689.pdf?src-supplier=Onlinecomponents.com, Construction=Rectangular, Contact Plating=Tin, Depth=1.25mm, Features="Automotive AEC-Q200", Height=0.6mm, Lead Free="Lead Free", Length=2mm, Manufacturer Part Number=ERJ-6ENF2003V, Military Standard=Not, Mount="Surface Mount", Number of Terminations=2, Packaging="Tape and Reel", Power Rating=125mW, Pricing 1="5000=0.01169 (USD)", Radiation Hardening=No, REACH SVHC="No SVHC", RoHS=Yes, RoHS Compliant=Yes, Series=ERJ, Size Code=0805, Stock 1=39039, Supplier 1=Digi-Key, Technology="THICK FILM", Termination=SMD/SMT, Tolerance=1%, Voltage Rating (DC)=150V, Width=1.2mm
R8 R11 R15 R17 R18: library part RES
R10 R14: library part ERJ-6GEYJ103V, "Resistor Thick Film 0805 10K Ohm 5% 1/8W 200ppm/C Molded SMD Punched Carrier T/R", Case Code (Imperial)=0805, Case Code (Metric)=2012, Manufacturer=Panasonic, Max Operating Temperature=155°C, Max Power Dissipation=125mW, Min Operating Temperature=-55°C, Package Quantity=5000, Resistance=10kR, Resistance Tolerance=5%, Resistor Type="Thick Film", Supplier Part Number 1=P10KATR-ND, Temperature Coefficient=200ppm/°C, Voltage Rating=150V, Case/Package=0805, Category="Chip SMD Resistors", ComponentLink1Description=https://datasheet.ciiva.com/43460/1500035-43460125.pdf?src-supplier=Farnell, ComponentLink1URL=https://datasheet.ciiva.com/43460/1500035-43460125.pdf?src-supplier=Farnell, ComponentLink2Description=https://datasheet.ciiva.com/46386/1500035-46386469.pdf?src-supplier=Element14, ComponentLink2URL=https://datasheet.ciiva.com/46386/1500035-46386469.pdf?src-supplier=Element14, ComponentLink3Description=https://datasheet.ciiva.com/22785/1500035-22785957.pdf?src-supplier=Farnell, ComponentLink3URL=https://datasheet.ciiva.com/22785/1500035-22785957.pdf?src-supplier=Farnell, ComponentLink4Description=https://datasheet.ciiva.com/28514/1678796-28514236.pdf?src-supplier=Element14, ComponentLink4URL=https://datasheet.ciiva.com/28514/1678796-28514236.pdf?src-supplier=Element14, Construction=Rectangular, Contact Plating=Tin, Depth=1.25mm, Features="Automotive AEC-Q200", Height=0.6mm, Lead Free="Lead Free", Length=2mm, Manufacturer Part Number=ERJ-6GEYJ103V, Military Standard=Not, Mount="Surface Mount", Number of Terminations=2, Packaging="Tape and Reel", Power Rating=125mW, Pricing 1="5000=0.00902 (USD)", Radiation Hardening=No, REACH SVHC="No SVHC", RoHS=Yes, RoHS Compliant=Yes, Series=ERJ, Size Code=0805, Stock 1=800131, Supplier 1=Digi-Key, Technology="THICK FILM", Termination=SMD/SMT, Tolerance=5%, Voltage Rating (DC)=150V, Width=0.049inch
U1: "Soft Sw PWM Cntrlr 2-OUT Power Supply Controller 200KHz/300KHz/400KHz/500KHz 32-Pin QFN EP", Case/Package=QFN, Manufacturer=Intersil, Max Operating Temperature=100°C, Min Operating Temperature=-40°C, Output Current=20A, Package Quantity=60, Switching Frequency=500kHz, Category="Voltage Regulators - Switching", ComponentLink1Description=https://datasheet.ciiva.com/25905/fn6453-25905351.pdf?src-supplier=Avnet+Europe, ComponentLink1URL=https://datasheet.ciiva.com/25905/fn6453-25905351.pdf?src-supplier=Avnet+Europe, Height=0.95mm, Lead Free="Lead Free", Length=5mm, Manufacturer Part Number=ISL6236AIRZ, Mount="Surface Mount", Number of Outputs=4, Packaging=Rail/Tube, Pricing 1="600=3.35800, 720=3.28900, 1320=3.22000, 3000=3.15100, 6000=3.08200, 30000=3.01300, 60000=2.94400 (USD)", Radiation Hardening=No, RoHS=Yes, RoHS Compliant=Yes, Supplier 1=Avnet, Supplier Part Number 1=ISL6236AIRZ, Width=5mm

## Nets (pads, with @x,y where several pads share a name; then routed paths per layer and width w, separated by ;. In a path a pad name is that pad's centre, name@x,y a point inside that pad or via, vN(x,y) a via of type N, cw(c..) or ccw(c..) an arc to the next point about the centre after c; other vN are vias at no path point)
+1V5: C9.1 J3.1 L1.1 R8.1 U1.10
+1V05: C10.1 J4.1 L2.2 U1.30
"+5V LDO": C1.2 R1.2 U1.7 | length 3.2
  Bottom Layer w0.15: U1.7 28.05,23.75 29.3,22.5 C1.2
"+5V PVCC": C3.2 R1.1 R2.2 R3.1 U1.19 | length 7.8
  Bottom Layer w0.15: R3.1 R1.1 R2.2 ; C3.2 19.8,24.25 U1.19
"+5V VCC": C4.2 R3.2 R9.2 R10.2 R12.2 R13.2 R14.2 R17.1 U1.2 U1.3 U1.20 | length 5.9
  Bottom Layer w0.15: U1.3 27.85,25.75 28.3,26.2 28.3,28.35 30.05,30.1 C4.2
+REF: C12.1 R15.1 U1.1
+VIN: C2.2 C5.2 C6.2 J1.1 Q1.8 Q2.8 R2.1 U1.6 | length 3.2
  Bottom Layer w0.15: U1.6 28.15,24.25 29.4,25.5 C2.2
+VREF3: C11.1 R16.2 U1.5 | length 4.7
  Bottom Layer w0.15: U1.5 28.226,24.75 28.7,25.224 28.7,26.35 30.05,27.7 C11.1
EN1: R14.1 U1.14 | length 3.3
  Bottom Layer w0.15: R14.1 23.1,20.5 24.25,21.65 U1.14
"EN LDO": R10.1 U1.4
FB1: R8.2 R9.1 R11.2 U1.11 | length 6.5
  Bottom Layer w0.15: U1.11 25.75,22.088 25.838,22 26.3,22 27.8,20.5 R9.1 R8.2
GND: C1.1 C2.1 C3.1 C4.1 C5.1 C6.1 C9.2 C10.2 C11.2 C12.2 J2.1 J5.1 J6.1 Q1.2 Q1.3 Q2.2 Q2.3 R6.2 R7.1 R11.1 R18.2 U1.8 U1.21 U1.22 U1.29 U1.33
LGATE1: Q2.4 U1.18
LGATE2: Q1.4 U1.23
NetC7_2: C7.2 R4.1 | length 2.6
  Bottom Layer w0.15: C7.2@17.85,19.3 17.85,21.8 R4.1
NetC8_1: C8.1 R5.2 | length 2.4
  Bottom Layer w0.15: C8.1 17.85,26.8 R5.2
NetR4_2: R4.2 U1.17 | length 3.3
  Bottom Layer w0.15: R4.2 20.6,21.9 21.95,23.25 U1.17
NetR5_1: R5.1 U1.24 | length 2.8
  Bottom Layer w0.15: R5.1 22.365,26.7 22.415,26.75 U1.24
NetR6_1: R6.1 U1.12 | length 3
  Bottom Layer w0.15: U1.12 25.25,20.95 25.5,20.7 R6.1
NetR7_2: R7.2 U1.31 | length 2.7
  Bottom Layer w0.15: R7.2 25.975,29.45 26.25,29.175 U1.31 ; R7.2@26,29.45 R7.2@26.25,29.2
PHASE1: C7.1 L1.2 Q2.5 Q2.6 Q2.7 U1.16 | length 5.3
  Bottom Layer w0.15: C7.1 21.1,19.5 23.25,21.65 U1.16
PHASE2: C8.2 L2.1 Q1.5 Q1.6 Q1.7 U1.25 | length 4.6
  Bottom Layer w0.15: C8.2 22.2,29.1 23.25,28.05 U1.25
POK1: R13.1 U1.13 U1.27 | length 7.5
  Bottom Layer w0.15: R13.1@21.3,33.15 R13.1 21.1,31.5 24.25,28.35 U1.27
POK2: R12.1 U1.28 | length 6.4
  Bottom Layer w0.15: R12.1 23.6,30 24.75,28.85 U1.28
REFIN2: R15.2 R16.1 R17.2 R18.1 U1.32 | length 14.5
  Bottom Layer w0.15: R15.2 R17.2 25.85,33.8 R16.1 25.75,33.4 26.75,32.4 U1.32
UGATE1: Q2.1 U1.15
UGATE2: Q1.1 U1.26
pads on no net: U1.9